# EAGLE board Combined-4-ordered-080117 (EAGLE 6.5.0)
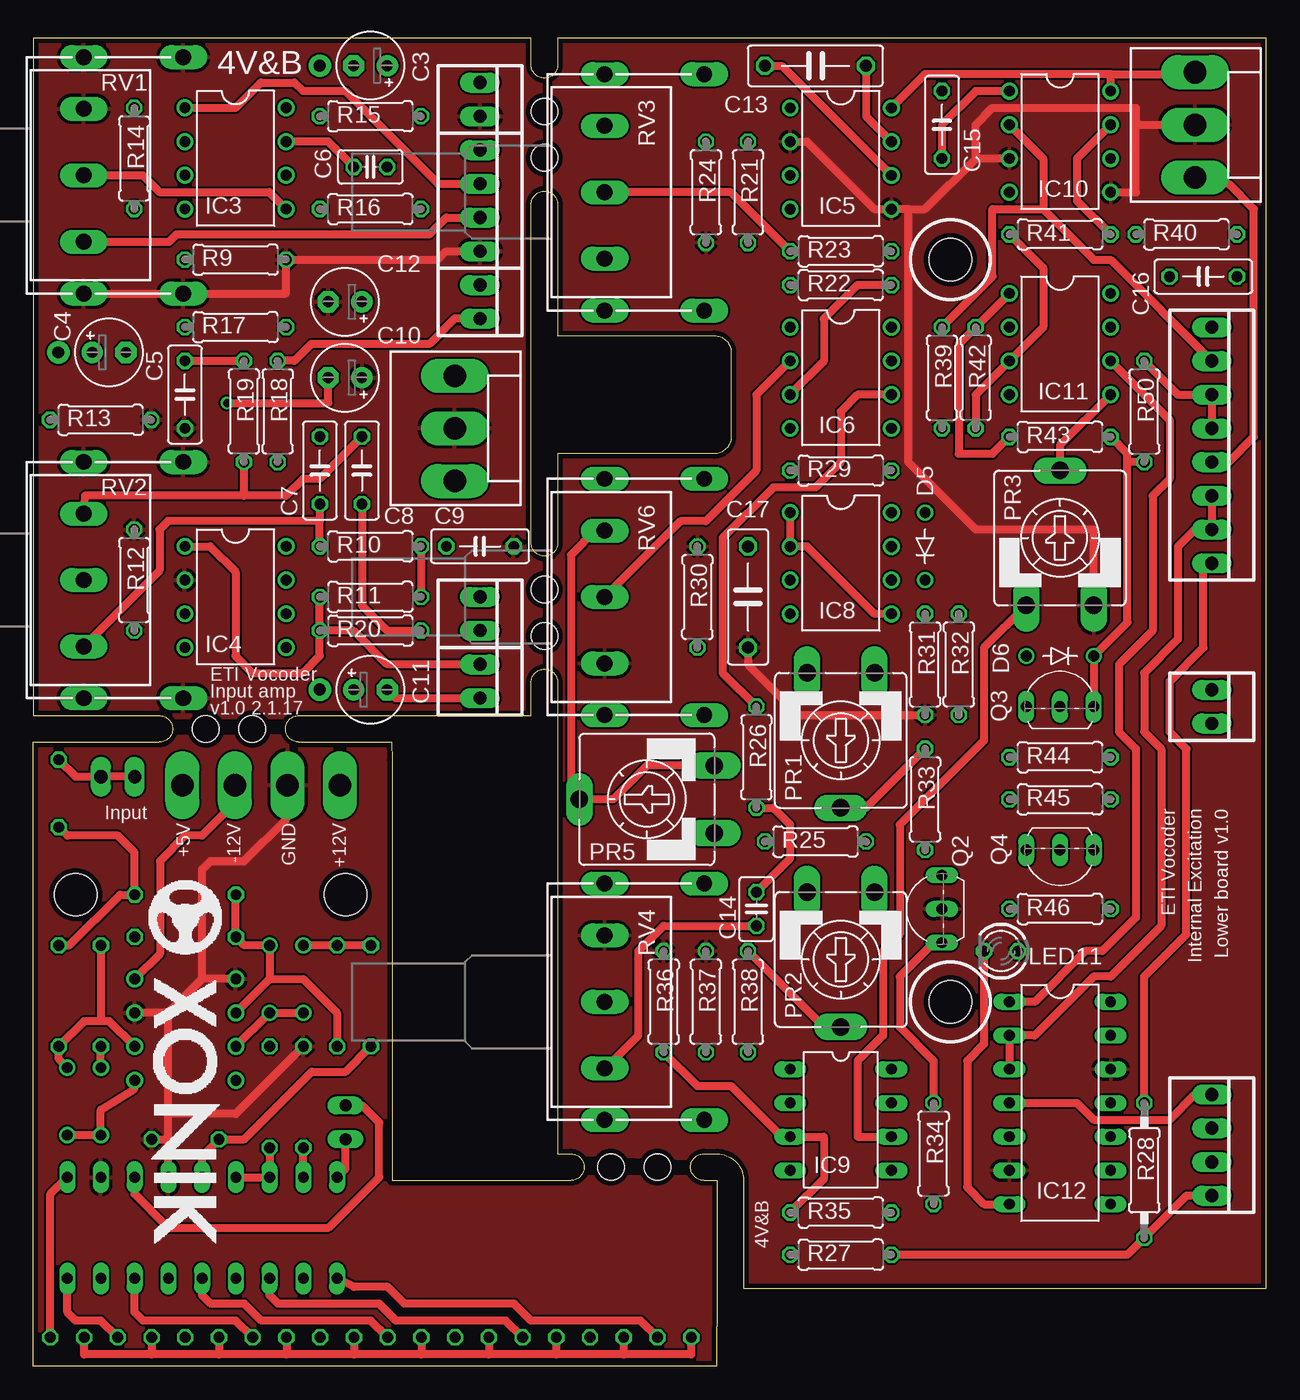
[diagram p0: board, top side]
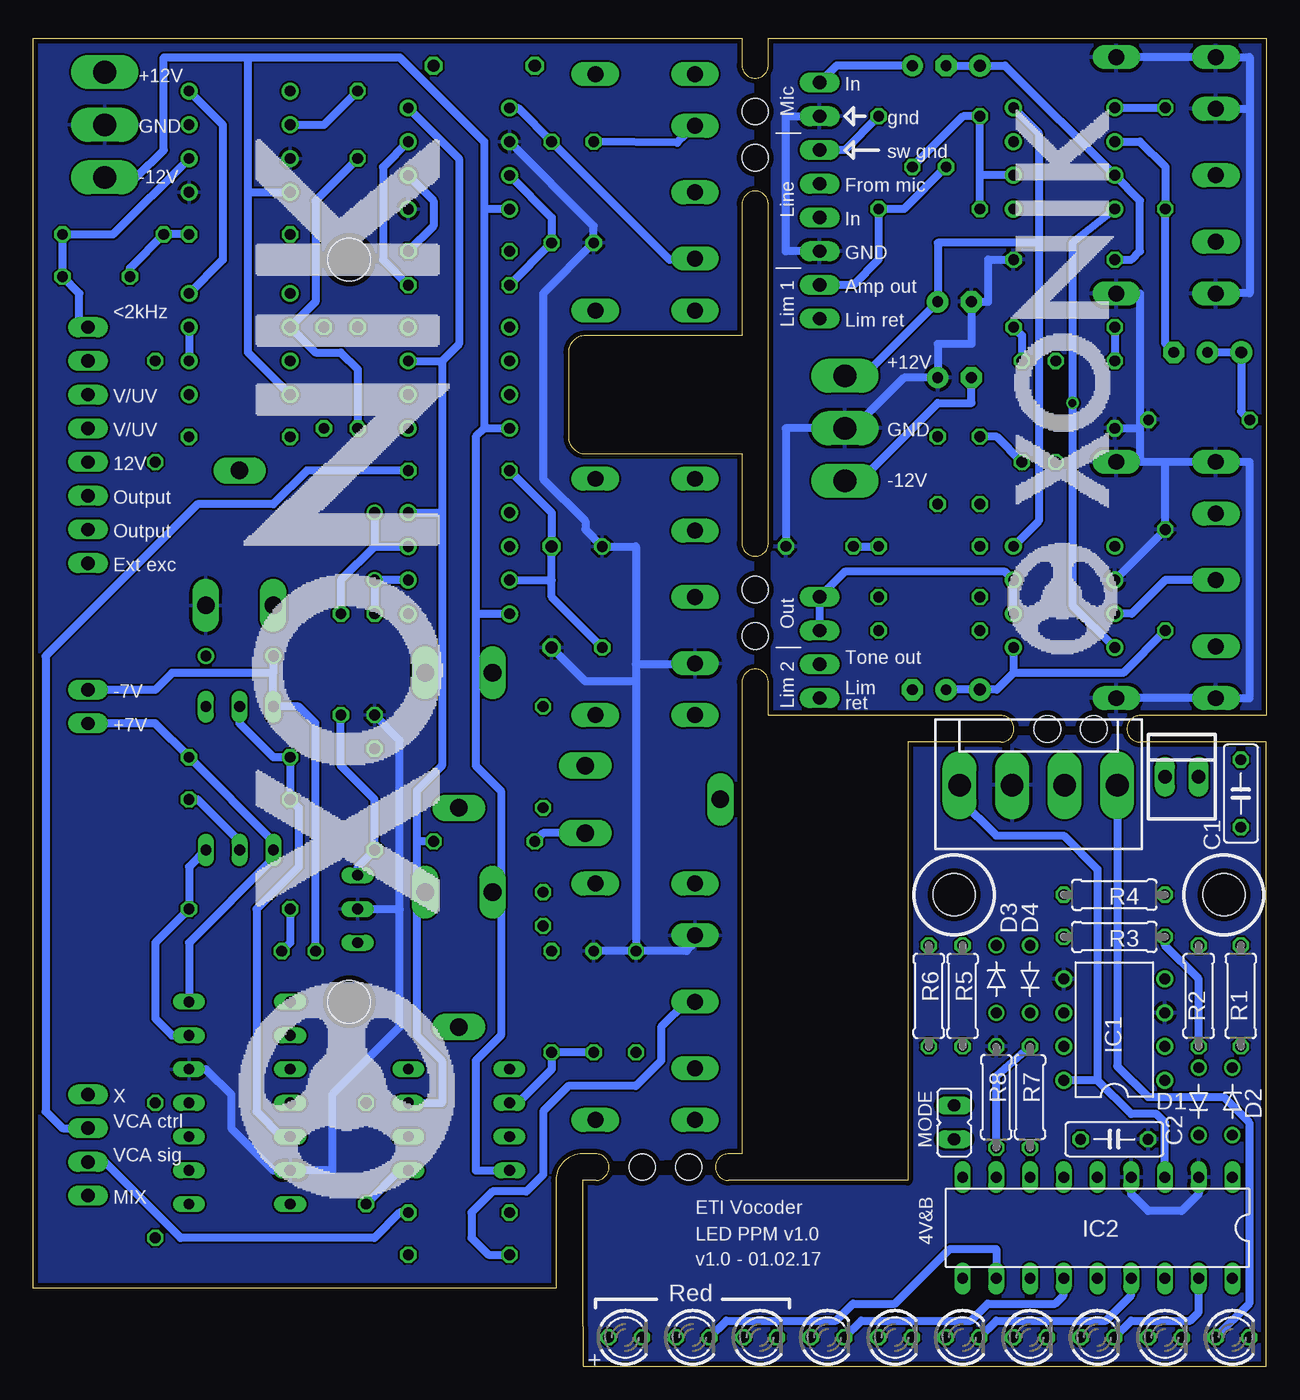
[diagram p1: board, bottom side, seen from below]

Size 92.87 x 100 mm. Coordinates in mm from the lower left corner, seen from the top.
Outline: 0,0 0,47 9.5,47 arc180 9.5,49 0,49 0,100 37.5,100 37.5,98 arc180 39.5,98 39.5,100 92.87,100 92.87,5.88 53.5,5.88 53.5,14 arc90 51.5,16 50.5,16 arc180 50.5,14 51.5,14 51.5,5.97 51.45,0 0,0
Outline: 20,47 27,47 27.01,45.67 27.01,14 40.5,14 arc180 40.5,16 39.5,16 39.5,51.5 arc180 37.5,51.5 37.5,49 20,49 arc180 20,47
Outline: 37.5,62 37.5,87.5 arc-180 39.5,87.5 39.5,77.62 51.29,77.62 arc-90 52.56,76.35 52.56,70 arc-90 51.29,68.73 39.5,68.73 39.5,62 arc-180 37.5,62
Copper layers (1*16): Top 0.0356mm / dielectric 1.5011mm / Bottom 0.0356mm
Design rules "oshpark-2layer": minimum track width 6mil, minimum drill 13mil, track to track 6mil, track to pad 6mil, pad to pad 6mil, via to via 6mil, smd to smd 6mil, copper to edge 15mil, drill to drill 6mil, minimum pad ring 7mil, minimum via ring 7mil, stop-mask expansion 2.5mil, vias tented up to drill 0mil, thermal gap 10mil
Holes 3.2 mm at 3.2,35.51 23.52,35.51 69.07,83.33 69.07,27.45
Holes 2 mm at 16.5,48 13,48 43.5,15 47,15 38.5,55 38.5,58.5 38.5,94.5 38.5,91

## Footprints (pad centres in the part's own frame; a part is rotated, then mirrored left to right if it is on the bottom)
22-23-2041 = drill 1 long: 1 -3.81,0; 2 -1.27,0; 3 1.27,0; 4 3.81,0
22-23-2021 = drill 1 long: 1 -1.27,0; 2 1.27,0
C050-025X075 = drill 0.813 octagon: 1 -2.54,0; 2 2.54,0
E2,5-5 = drill 0.813 pad 1.6: + -1.27,0 | drill 0.813 pad 1.6 octagon: - 1.27,0
C025-025X050 = drill 0.813 octagon: 1 -1.27,0; 2 1.27,0
C075-032X103 = drill 0.914 octagon: 1 -3.81,0; 2 3.81,0
DO35-5J = drill 0.813: A 2.54,0; C -2.54,0
DIL08 = drill 0.813 pad 1.27: 1 -3.81,-3.81; 2 -1.27,-3.81; 3 1.27,-3.81; 4 3.81,-3.81; 5 3.81,3.81; 6 1.27,3.81; 7 -1.27,3.81; 8 -3.81,3.81
DIL18 = drill 0.813 long: 1 -10.16,-3.81; 2 -7.62,-3.81; 3 -5.08,-3.81; 4 -2.54,-3.81; 5 0,-3.81; 6 2.54,-3.81; 7 5.08,-3.81; 8 7.62,-3.81; 9 10.16,-3.81; 10 10.16,3.81; 11 7.62,3.81; 12 5.08,3.81; 13 2.54,3.81; 14 0,3.81; 15 -2.54,3.81; 16 -5.08,3.81; 17 -7.62,3.81; 18 -10.16,3.81
DIL08' = drill 0.813 long: 1 -3.81,-3.81; 2 -1.27,-3.81; 3 1.27,-3.81; 4 3.81,-3.81; 5 3.81,3.81; 6 1.27,3.81; 7 -1.27,3.81; 8 -3.81,3.81
DIL14 = drill 0.813 long: 1 -7.62,-3.81; 2 -5.08,-3.81; 3 -2.54,-3.81; 4 0,-3.81; 5 2.54,-3.81; 6 5.08,-3.81; 7 7.62,-3.81; 8 7.62,3.81; 9 5.08,3.81; 10 2.54,3.81; 11 0,3.81; 12 -2.54,3.81; 13 -5.08,3.81; 14 -7.62,3.81
22-23-2081 = drill 1 long: 1 -8.89,0; 2 -6.35,0; 3 -3.81,0; 4 -1.27,0; 5 1.27,0; 6 3.81,0; 7 6.35,0; 8 8.89,0
LED3MM = drill 0.813 octagon: A -1.27,0; K 1.27,0
JP1 = drill 0.914 long: 1 0,-1.27; 2 0,1.27
KK-156-4 = drill 1.7 pad 2.184 long: 1 -5.94,0; 2 -1.98,0; 3 1.98,0; 4 5.94,0
KK-156-3 = drill 1.7 pad 2.184 long: 1 -3.96,0; 2 0,0; 3 3.96,0
CA9V = drill 1.321 long: A -2.54,-5.08; E 2.54,-5.08; S 0,5.08
TO92-CBE = drill 0.813 long: B 0,0; C -2.54,0; E 2.54,0
TO92-ECB = drill 0.813 long: B 2.54,0; C 0,0; E -2.54,0
0207/7 = drill 0.813 octagon: 1 -3.81,0; 2 3.81,0
0207/10 = drill 0.813 octagon: 1 -5.08,0; 2 5.08,0
POT16_W_BRACKET = drill 1.2 long: 1A -5,0; 1E 5,0; 1S 0,0; M1 -8.9,0; M2 8.9,0; M3 8.9,7.5; M4 -8.9,7.5

## Placement (x,y rotation side)
BOARD2  22-23-2041  [22-23-2041]  88.75,16.66 270 top
BOARD2-PWR  22-23-2021  [22-23-2021]  88.75,49.68 270 top
C1  220n  [C050-025X075]  1.93,43.13 270 bottom
C2  470n  [C050-025X075]  11.45,17.1 180 bottom
C3  1u  [E2,5-5]  25.39,97.94 180 top
C4  22u  [E2,5-5]  5.71,76.36 0 top
C5  220n  [C050-025X075]  11.42,73.18 270 top
C6  68p  [C025-025X050]  25.39,90.33 180 top
C7  2n2  [C050-025X075]  21.58,67.47 270 top
C8  2n2  [C050-025X075]  24.76,67.47 270 top
C9  220n  [C050-025X075]  33.65,61.75 180 top
C10  22u/25V  [E2,5-5]  23.49,74.45 180 top
C11  1u  [E2,5-5]  25.39,50.95 0 top
C12  22u/25V  [E2,5-5]  23.49,80.17 180 top
C13  100n  [C075-032X103]  58.91,97.94 0 top
C14  10n  [C025-025X050]  54.47,34.44 90 top
C15  220n  [C050-025X075]  68.44,93.49 270 top
C16  1u0  [C050-025X075]  88.12,82.06 180 top
C17  100n  [C075-032X103]  53.83,57.93 90 top
D1  1N4148DOJ35-5  [DO35-5J]  5.1,19.95 90 bottom
D2  1N4148DOJ35-5  [DO35-5J]  2.56,19.95 270 bottom
D3  1N4148DOJ35-5  [DO35-5J]  20.34,29.16 270 bottom
D4  1N4148DOJ35-5  [DO35-5J]  17.8,29.16 90 bottom
D5  1N4148  [DO35-5J]  67.17,61.74 90 top
D6  1N4148  [DO35-5J]  77.33,53.49 180 top
IC1  TL082P  [DIL08]  11.45,25.35 90 bottom
IC2  LM3915N  [DIL18]  12.72,10.43 180 bottom
IC3  LM4558N  [DIL08]  15.23,90.96 270 top
IC4  LM1458N  [DIL08]  15.23,57.94 270 top
IC5  LM1458N  [DIL08]  60.81,90.95 270 top
IC6  TL081P  [DIL08]  60.81,74.44 270 top
IC8  TL082P  [DIL08]  60.81,60.47 270 top
IC9  CA3080E  [DIL08']  60.81,18.56 270 top
IC10  LM1458N  [DIL08]  77.33,92.22 270 top
IC11  LM1458N  [DIL08]  77.33,76.98 270 top
IC12  4016N  [DIL14]  77.33,19.83 270 top
IN  22-23-2021  [22-23-2021]  6.37,44.4 0 bottom
IO  22-23-2081  [22-23-2081]  88.75,69.36 270 top
LED1  [LED3MM]  2.56,2.17 0 bottom
LED2  [LED3MM]  7.64,2.17 0 bottom
LED3  [LED3MM]  12.72,2.17 0 bottom
LED4  [LED3MM]  17.8,2.17 0 bottom
LED5  [LED3MM]  22.88,2.17 0 bottom
LED6  [LED3MM]  27.96,2.17 0 bottom
LED7  [LED3MM]  33.04,2.17 0 bottom
LED8  [LED3MM]  38.12,2.17 0 bottom
LED9  [LED3MM]  43.2,2.17 0 bottom
LED10  [LED3MM]  48.28,2.17 0 bottom
LED11  [LED3MM]  72.88,31.26 180 top
LIM1  22-23-2021  [22-23-2021]  33.65,80.17 270 top
LIM2  22-23-2021  [22-23-2021]  33.65,51.59 270 top
LINE  22-23-2041  [22-23-2041]  33.65,87.78 270 top
MIC  22-23-2021  [22-23-2021]  33.65,95.41 270 top
MODE  [JP1]  23.52,18.37 0 bottom
OUT  22-23-2021  [22-23-2021]  33.65,56.67 270 top
POWER  [KK-156-4]  17.17,43.77 0 bottom
POWER1  [KK-156-3]  31.74,70.64 270 top
POWER2  [KK-156-3]  87.48,93.49 270 top
PR1  100k  [CA9V]  60.81,47.14 180 top
PR2  100k  [CA9V]  60.81,30.63 180 top
PR3  220k  [CA9V]  77.33,62.38 0 top
PR5  2k2  [CA9V]  46.21,42.69 90 top
Q2  BC212L  [TO92-CBE]  68.44,34.44 90 top
Q3  BC182L  [TO92-ECB]  77.33,49.68 0 top
Q4  BC212L  [TO92-CBE]  77.33,38.88 180 top
R1  100k  [0207/7]  1.93,27.89 90 bottom
R2  100k  [0207/7]  5.1,27.89 90 bottom
R3  100k  [0207/7]  11.45,32.34 0 bottom
R4  200k  [0207/7]  11.45,35.51 0 bottom
R5  200k  [0207/7]  22.88,27.89 270 bottom
R6  1k  [0207/7]  25.42,27.89 270 bottom
R7  680R  [0207/7]  17.8,20.27 270 bottom
R8  150R  [0207/7]  20.34,20.27 270 bottom
R9  100k  [0207/7]  15.23,83.34 180 top
R10  47k  [0207/7]  25.39,61.75 0 top
R11  1k5  [0207/7]  25.39,57.94 180 top
R12  100k  [0207/7]  7.61,59.21 270 top
R13  470R/5k6  [0207/7]  5.07,71.28 180 top
R14  22k  [0207/7]  7.61,90.96 270 top
R15  11k  [0207/7]  25.39,94.14 180 top
R16  100k  [0207/7]  25.39,87.15 0 top
R17  1k5  [0207/7]  15.23,78.26 180 top
R18  51k  [0207/7]  18.41,71.91 270 top
R19  47k  [0207/7]  15.87,71.91 90 top
R20  51k  [0207/7]  25.39,55.4 180 top
R21  10k  [0207/7]  53.83,88.41 90 top
R22  5k6  [0207/7]  60.81,81.43 0 top
R23  18k  [0207/7]  60.81,83.97 180 top
R24  560R  [0207/7]  50.66,88.41 270 top
R25  11k  [0207/7]  58.91,39.52 180 top
R26  150k  [0207/7]  54.47,45.87 90 top
R27  47k  [0207/7]  60.81,8.4 180 top
R28  47k  [0207/10]  83.67,14.75 90 top
R29  10k  [0207/7]  60.81,67.46 180 top
R30  1M  [0207/7]  50.02,57.93 90 top
R31  3k9  [0207/7]  67.17,52.85 270 top
R32  22k  [0207/7]  69.7,52.85 90 top
R33  470k  [0207/7]  67.17,42.69 270 top
R34  10k  [0207/7]  67.8,16.02 270 top
R35  47k  [0207/7]  60.81,11.58 0 top
R36  1k5  [0207/7]  47.48,27.45 90 top
R37  1k5  [0207/7]  50.66,27.45 90 top
R38  470k  [0207/7]  53.83,27.45 90 top
R39  47k  [0207/7]  68.44,74.44 270 top
R40  10k  [0207/7]  86.85,85.24 180 top
R41  1k  [0207/7]  77.33,85.24 180 top
R42  1M  [0207/7]  70.97,74.44 90 top
R43  47k  [0207/7]  77.33,70 0 top
R44  10k  [0207/7]  77.33,45.87 0 top
R45  10k  [0207/7]  77.33,42.69 180 top
R46  1k5  [0207/7]  77.33,34.44 180 top
R50  10k  [0207/7]  83.67,71.9 270 top
RV1  10k log  [POT16_W_BRACKET]  3.8,89.69 270 top
RV2  47k lin  [POT16_W_BRACKET]  3.8,59.21 270 top
RV3  10k log  [POT16_W_BRACKET]  43.03,88.41 270 top
RV4  10k log  [POT16_W_BRACKET]  43.03,27.45 270 top
RV6  10k  [POT16_W_BRACKET]  43.03,57.93 270 top

## Library data of the parts
BOARD2 LINE = con-molex; MF: MOLEX; MPN: 22-23-2041; OC_FARNELL: 1462920; OC_NEWARK: 38C0355
BOARD2-PWR IN LIM1 LIM2 MIC OUT = con-molex; MF: MOLEX; MPN: 22-23-2021; OC_FARNELL: 1462926; OC_NEWARK: 25C3832
C1-C17 R1-R46 R50 = resistor
D1-D6 IC9 RV1-RV4 RV6 = joakim
IC1 = linear; DATA_SHEET: <a href="http://www.ti.com/lit/ds/symlink/tl084a.pdf"> Data sheet </a>
IC2 = national-semiconductor
IC3-IC6 IC8 IC10 IC11 = linear
IC12 = 40xx
IO = con-molex; MF: MOLEX; MPN: 22-23-2081; OC_FARNELL: 1756826; OC_NEWARK: 01C7592
LED1-LED11 = led
MODE = jumper
POWER POWER1 POWER2 = con-molex; OC_FARNELL: unknown; OC_NEWARK: unknown
PR1-PR3 PR5 = pot
Q2-Q4 = transistor

## Nets
2KHZ: C16.1 IC10.6 IO.1 R40.1
4KHZ: C15.1 IC10.2 IO.2 R39.1
+5V: LED1.A LED2.A LED3.A LED4.A LED5.A LED6.A LED7.A LED8.A LED9.A LED10.A POWER.4
+12V: IC1.8 IC2.3 MODE.2 POWER.1
+12V1: C12.+ IC3.8 IC4.8 POWER1.1
+12V2: IC5.8 IC6.7 IC8.8 IC9.7 IC10.8 IC11.8 POWER2.1 PR1.A PR2.A R25.1
-12V: IC1.4 POWER.3
-12V1: C10.- IC3.4 IC4.4 POWER1.3
-12V2: IC5.4 IC6.4 IC8.4 IC9.4 IC10.4 IC11.4 IO.5 POWER2.3 PR1.E PR2.E
AMP_OUT: C6.2 IC3.7 LIM1.1 R16.2
BOARD2_MIX: BOARD2.4 R27.1 R28.1
BUFFER_IN: C11.- LIM2.2
EXT_EXCIT: IO.8 R28.2
GND: C2.1 IC1.3 IC1.5 IC2.2 IC2.4 POWER.2 R8.1
GND1: C5.2 C9.1 C10.+ C12.- IC4.2 LINE.4 MIC.2 POWER1.2 R9.1 R12.1 R13.1 RV1.1A RV1.M1 RV1.M2 RV1.M3 RV1.M4 RV2.M1 RV2.M2 RV2.M3 RV2.M4
GND2: C17.1 IC5.2 IC5.5 IC10.3 IC10.5 IC12.6 IC12.12 POWER2.2 PR3.E Q2.B R24.2 R30.2 R31.2 R36.2 R37.2 RV4.1A RV6.1E
LINE_IN: LINE.3 RV1.1E
MIC_IN: C3.+ MIC.1
MIC_OUT: IC3.1 LINE.2 R14.1
MODE: IC2.9 MODE.1
N$1: D1.A R2.1 R3.2
N$2: D2.C IC1.2 R1.1 R2.2
N$3: D1.C D2.A IC1.1
N$4: D4.A IC1.6 R3.1 R4.1 R5.2
N$5: D3.C R5.1 R6.1
N$6: C1.2 R1.2 R4.2
N$7: D3.A D4.C IC1.7
N$8: C2.2 IC2.5 R6.2
N$9: IC2.6 IC2.7 R7.2
N$10: C3.- IC3.3 R9.2
N$11: IC2.1 LED1.K
N$12: IC2.18 LED2.K
N$13: IC2.17 LED3.K
N$14: IC2.16 LED4.K
N$15: IC2.15 LED5.K
N$16: IC2.14 LED6.K
N$17: IC2.13 LED7.K
N$18: IC2.12 LED8.K
N$19: IC2.11 LED9.K
N$20: IC2.10 LED10.K
N$21: IC2.8 R7.1 R8.2
N$22: C1.1 IN.1 IN.2
N$23: C4.- IC3.2 R14.2
N$24: C4.+ R13.2
N$25: C6.1 IC3.6 R15.2 R16.1
N$26: C5.1 R17.2 R19.2
N$27: C8.1 R19.1 RV2.1A
N$28: C7.2 R10.1 RV2.1E
N$29: C7.1 R18.2
N$30: C8.2 R20.1
N$31: C9.2 R10.2 R11.1
N$32: C11.+ IC4.5 R12.2
N$33: IC4.3 RV2.1S
N$34: IC3.5 RV1.1S
N$35: IC5.3 R21.1 R22.1
N$36: IC5.1 R21.2 RV3.1E
N$37: R23.2 RV3.1S
N$38: C13.1 IC5.6 R23.1
N$39: R24.1 RV3.1A
N$40: C13.2 IC5.7 IC6.3 R22.2
N$41: IC6.2 RV6.1S
N$42: PR5.A R25.2
N$43: PR5.E PR5.S RV6.1A
N$44: IC6.6 R26.2
N$45: C14.2 R26.1
N$46: C14.1 RV4.1E
N$47: R27.2 RV4.1S
N$48: C15.2 IC10.1 IC11.2 R39.2
N$49: C16.2 IC10.7 R40.2 R41.1
N$50: IC11.3 R41.2 R42.1
N$51: IC11.1 R42.2 R43.1
N$52: IC12.5 Q3.C R44.1 R45.2
N$53: Q4.B R45.1
N$54: D6.C Q3.B R43.2 R50.2
N$55: IC12.13 Q4.C R46.1
N$56: LED11.A R46.2
N$57: IC9.3 R35.1 R36.1
N$58: IC9.2 R37.1 R38.1
N$59: PR2.S R38.2
N$60: IC9.5 R34.2
N$61: Q2.E R32.1 R33.2
N$62: PR1.S R33.1
N$63: IC11.5 PR3.S
N$64: IC11.6 IC11.7 IC12.1
N$65: D5.A IC8.7 R32.2
N$66: IC8.1 IC8.2 IC8.5
N$67: D5.C IC8.6 R31.1
N$68: C17.2 IC8.3 R29.2 R30.1
N$69: IC9.6 PR3.A
N$70: Q2.C R34.1
OUT: IC4.6 IC4.7 OUT.1 OUT.2
OUT1: IC12.2 IC12.3 IO.6 IO.7
SWITCHED_GND: LINE.1 R15.1
TONE_IN: LIM1.2 R17.1 R18.1
TONE_OUT: IC4.1 LIM2.1 R11.2 R20.2
V_UV_ON_OFF: IO.3 IO.4 R50.1
VCA_CTRL: BOARD2.2 R29.1
VCA_SIGNAL: BOARD2.3 R35.2
VDD: BOARD2-PWR.2 IC12.14 Q4.E R44.2
VSS: BOARD2-PWR.1 D6.A IC12.7 LED11.K Q3.E
X: BOARD2.1 IC12.4

## Tracks (layer width: path | path; a pad name or v marks a point on that pad's centre or on a via)
2KHZ
  Bottom 0.61: IO.1 89.39,78.89 89.39,80.79 C16.1 R40.1 86.85,85.24 IC10.6
4KHZ
  Top 0.61: IC10.2 76.06,90.95 76.06,87.14 | 76.06,87.14 79.86,83.33 81.14,83.33 IO.2 | R39.1 72.25,82.06 72.25,87.14 76.06,87.14
  Bottom 0.61: IC10.2 70.97,93.49 C15.1
+5V
  Top 0.61: LED10.A 49.55,0.91 44.47,0.91 | 44.47,0.91 39.39,0.91 | 39.39,0.91 34.31,0.91 | 34.31,0.91 29.23,0.91 | 29.23,0.91 24.15,0.91 | 24.15,0.91 19.07,0.91 | 19.07,0.91 13.99,0.91 | 13.99,0.91 8.91,0.91 | 8.91,0.91 3.83,0.91 LED1.A | LED2.A 8.91,0.91 | LED3.A 13.99,0.91 | LED4.A 19.07,0.91 | LED5.A 24.15,0.91 | LED6.A 29.23,0.91 | LED7.A 34.31,0.91 | LED8.A 39.39,0.91 | LED9.A 44.47,0.91
  Bottom 0.61: POWER.4 11.23,22.59 8.91,20.27 3.2,20.27 1.29,18.37 1.29,4.71 LED1.A
+12V
  Top 0.61: IC2.3 7.64,12.97 10.18,10.43 22.25,10.43 26.06,14.24 26.06,18.37 24.79,19.64 MODE.2
  Bottom 0.61: IC2.3 7.64,18.37 8.28,19 10.18,19 12.72,21.54 | 12.72,21.54 IC1.8 | POWER.1 23.11,42.72 20.34,39.96 15.26,39.96 12.72,37.42 12.72,21.54
+12V1
  Bottom 0.61: IC3.8 17.14,92.86 17.14,84.61 | 17.14,84.61 17.14,63.66 IC4.8 | POWER1.1 31.59,74.45 30.47,74.45 C12.+ 24.76,84.61 17.14,84.61
+12V2
  Top 0.61: 81.14,97.3 67.17,97.3 IC5.8 | IC10.8 81.14,97.3 | 81.14,97.3 88.61,97.3 POWER2.1
  Bottom 0.61: IC5.8 60.81,90.95 60.81,76.98 62.09,75.71 | 62.09,75.71 62.09,64.28 | IC6.7 62.09,75.71 | IC8.8 62.09,64.28 | 62.09,64.28 62.09,52.22 | PR1.A 62.09,52.22 | 62.09,52.22 62.09,45.23 63.99,43.33 63.99,39.52 | 63.99,39.52 63.99,36.34 PR2.A 63.99,35.07 63.99,24.91 62.09,23.01 62.09,19.83 IC9.7 | IC11.8 78.59,83.33 78.59,93.49 IC10.8 | R25.1 63.99,39.52
-12V
  Top 0.61: POWER.3 15.19,42.42 12.72,39.96 11.45,39.96 9.55,38.05 9.55,31.07 IC1.4
-12V1  (via drill 0.6)
  Top 0.61: v14.6,72.55 22.22,72.55 C10.-
  Bottom 0.61: POWER1.3 30.62,66.68 24.76,72.55 22.22,72.55 C10.- | IC3.4 14.6,84.61 v14.6,72.55 14.6,57.3 IC4.4
-12V2
  Top 0.61: IO.5 90.03,68.09 91.93,70 91.93,87.14 90.03,89.05 87.97,89.05 POWER2.3
  Bottom 0.61: IC5.4 58.91,87.14 | 58.91,87.14 58.91,70.63 | 58.91,70.63 59.55,70 59.55,56.66 | IC6.4 58.91,70.63 | 59.55,56.66 59.55,52.22 | 59.55,52.22 59.55,45.23 57.64,43.33 57.64,36.34 PR2.E 57.64,35.07 57.64,24.91 59.55,23.01 59.55,14.75 IC9.4 | PR1.E 59.55,52.22 | IC8.4 59.55,56.66 | 76.69,88.41 76.69,76.35 IC11.4 | 76.69,88.41 IC10.4 | 76.69,88.41 76.69,98.57 | 76.69,98.57 65.26,98.57 58.91,92.22 58.91,87.14 | POWER2.3 85.09,89.53 83.04,91.59 83.04,98.57 76.69,98.57
AMP_OUT
  Top 0.61: C6.2 22.22,92.23 IC3.7
  Bottom 0.61: LIM1.1 31.11,81.44 29.2,83.34 R16.2 27.3,87.15 C6.2
BOARD2_MIX
  Top 0.61: R27.1 82.41,8.4 R28.1 86.85,12.85 BOARD2.4
BUFFER_IN
  Top 0.61: C11.- 27.3,50.32 LIM2.2
EXT_EXCIT
  Top 0.61: R28.2 83.67,29.36 86.85,32.53 86.85,46.5 85.58,47.77 85.58,51.58 88.12,54.12 88.12,59.84 IO.8
GND
  Top 0.61: IC2.4 10.18,17.1 | C2.1 10.18,17.1 | 10.18,17.1 10.18,19 | 10.18,19 10.18,26.62 | 10.18,26.62 IC1.3 | 12.72,29.16 10.18,26.62 | IC1.5 12.72,29.16 | 12.72,29.16 12.72,37.42 13.36,38.05 15.9,38.05 19.07,41.23 19.07,43.69 POWER.2 | R8.1 15.26,19 10.18,19
  Bottom 0.61: IC2.2 5.1,12.97 6.37,11.7 8.91,11.7 10.18,12.97 IC2.4
  pour Bottom: 51.5,-1.21 51.5,14.25 28.75,14.25 28.67,14.22 27.5,14.22 27.5,47.25 -0.65,47.72 -0.65,-1.13
  pour Top: 51.18,-1.89 -1.5,-1.8 -1.5,47.38 27.5,47.5 27.5,14.38 27.52,14.13 28.25,14.25 51.5,14.25 51.75,-1.89
GND1
  Top 0.61: LINE.4 31.11,83.97 30.47,83.34 R9.1 19.04,80.8 19.03,80.79 RV1.M3 RV1.M2
  Bottom 0.61: RV1.M3 9.53,80.79 9.52,80.8 9.52,71.28 | 9.52,71.28 9.52,70.64 | 9.52,70.64 9.52,68.1 | 9.52,68.1 RV2.M4 | 7.61,68.11 RV2.M1 1.26,68.1 1.26,50.32 1.27,50.31 RV2.M2 RV2.M3 | 7.61,68.11 9.51,68.11 9.52,68.1 | 1.26,94.77 1.26,98.58 1.27,98.59 RV1.M1 RV1.M4 | 1.26,94.77 1.26,80.8 RV1.M2 | 7.61,68.11 R12.1 IC4.2 | RV1.1A 1.34,94.69 1.26,94.77 | C5.2 9.52,70.64 | R9.1 20.95,83.34 20.95,80.17 C12.- 22.22,76.99 24.76,76.99 C10.+ 27.3,74.45 31.11,70.64 POWER1.2 36.19,70.64 C9.1 | R13.1 9.52,71.28 | LINE.4 36.19,83.97 36.19,94.14 MIC.2
  pour Top: 0.12,100.68 38.09,100.68 38.22,100.8 38.22,48.86 0.37,48.86 0.25,48.73 0.25,100.55
  pour Bottom: -0.64,100.04 37.08,100.04 37.2,99.91 37.2,48.35 -0.39,48.35 -0.39,99.79
GND2
  Top 0.61: IC5.2 58.27,92.22 63.35,87.14 IC5.5 65.89,87.14 | C17.1 53.83,52.85 57.64,49.04 R31.2 | IC10.5 83.04,88.41 83.04,93.49 | 70.97,90.95 67.17,87.14 65.89,87.14 | IC10.3 70.97,90.95 | 70.97,90.95 70.97,93.49 72.25,94.76 83.04,94.76 83.04,93.49 | 83.04,93.49 POWER2.2 | PR3.E 79.86,63.01 70.97,63.01 65.89,68.09 65.89,87.14
  Bottom 0.61: IC5.2 50.66,85.87 R24.2 54.47,80.79 54.47,66.82 51.29,63.65 51.29,63.01 R30.2 47.48,61.74 47.48,52.85 | RV6.1E 43.12,52.85 47.48,52.85 | 47.48,52.85 47.48,51.58 | 47.48,51.58 51.29,51.58 C17.1 | 47.48,51.58 R36.2 | 43.03,32.53 RV4.1A 43.03,31.9 43.67,31.26 R36.2 | R36.2 R37.2 | IC12.12 79.86,22.37 77.96,20.47 77.96,17.93 74.78,14.75 IC12.6 70.34,14.75 70.34,20.47 65.26,25.55 65.26,34.44 | 65.26,34.44 65.26,47.14 R31.2 | Q2.B 65.26,34.44
  pour Bottom: 93.83,100.6 38.72,100.6 38.72,15.73 52,15.5 53,15 53,5.5 93.83,5.23
  pour Top: 93.2,99.84 39.23,99.84 39.23,15.98 52.5,15.5 53,15 53.5,5.5 93.2,5.48
LINE_IN
  Top 0.61: RV1.1E 10.23,84.69 10.79,85.25 29.84,85.25 31.11,86.52 LINE.3
MIC_IN
  Bottom 0.61: C3.+ 32.38,97.94 MIC.1
MIC_OUT
  Top 0.61: IC3.1 15.23,94.77 17.14,96.67 19.68,96.67 20.31,96.04 23.49,96.04 30.47,89.06 LINE.2
  Bottom 0.61: IC3.1 R14.1
MODE
  Top 0.61: IC2.9 23.52,14.88 MODE.1
N$1
  Top 0.61: D1.A R2.1
  Bottom 0.61: R2.1 5.1,29.16 7.64,31.7 R3.2
N$2
  Top 0.61: IC1.2 5.74,25.99 5.1,25.99 | 5.1,25.99 3.83,25.99 R1.1 1.93,23.13 D2.C | R2.2 5.1,25.99
N$3
  Top 0.61: D2.A D1.C 5.1,19.32 7.64,20.91 IC1.1
N$4
  Top 0.61: IC1.6 17.8,29.16 | 17.8,29.16 20.34,29.16 22.88,26.62 R5.2 | 17.8,29.16 D4.A 15.9,31.7 R3.1 R4.1
N$5
  Top 0.61: R6.1 R5.1 D3.C
N$6
  Top 0.61: R1.2 2.73,31.7 6.54,35.51 R4.2 7.64,38.69 6.37,39.96 2.56,39.96 C1.2
N$7
  Top 0.61: IC1.7 D4.C D3.A
N$8
  Top 0.61: IC2.5 12.72,15.83 C2.2 15.9,17.1 20.98,22.18 23.52,22.18 R6.2
N$9
  Top 0.61: IC2.6 IC2.7 R7.2
N$10  (via drill 0.9 pad 1.68)
  Bottom 0.61: C3.- v21.58,97.94 19.68,97.94 IC3.3 9.52,87.78 9.52,83.97 10.15,83.34 R9.2
N$11
  Top 0.61: LED1.K 1.29,12.97 IC2.1
N$12
  Top 0.61: LED2.K 5.1,3.44 3.2,3.44 2.56,4.08 IC2.18
N$13
  Bottom 0.61: LED3.K 10.18,3.44 5.74,3.44 5.1,4.08 IC2.17
N$14
  Top 0.61: LED4.K 15.26,3.44 8.28,3.44 7.64,4.08 IC2.16
N$15
  Bottom 0.61: LED5.K 20.34,3.44 12.09,3.44 10.18,5.35 IC2.15
N$16
  Top 0.61: LED6.K 25.42,3.44 17.17,3.44 15.9,4.71 13.36,4.71 12.72,5.35 IC2.14
N$17
  Bottom 0.61: LED7.K 30.5,3.44 22.25,3.44 20.98,4.71 15.9,4.71 15.26,5.35 IC2.13
N$18
  Top 0.61: LED8.K 35.58,3.44 27.33,3.44 26.06,4.71 18.44,4.71 17.8,5.35 IC2.12
N$19
  Bottom 0.61: LED9.K 40.66,3.44 32.41,3.44 31.14,4.71 27.96,4.71 23.84,8.84 20.34,8.84 IC2.11
N$20
  Top 0.61: LED10.K 45.74,3.44 37.49,3.44 36.22,4.71 27.96,4.71 26.69,5.99 24.15,5.99 IC2.10
N$21
  Top 0.61: IC2.8 R8.2
  Bottom 0.61: R8.2 20.34,21.86 R7.1
N$22
  Top 0.61: C1.1 3.2,44.4 IN.2 IN.1
N$23
  Bottom 0.61: C4.- 7.61,76.99 R14.2 7.61,90.33 9.52,92.23 IC3.2
N$24  (via drill 0.9 pad 1.68)
  Bottom 0.61: C4.+ v1.9,76.36 1.9,71.91 R13.2
N$25
  Bottom 0.61: R16.1 21.58,89.69 | 21.58,89.69 R15.2 22.85,94.14 C6.1 | IC3.6 21.58,89.69
N$26
  Top 0.61: C5.1 R19.2
  Bottom 0.61: R17.2 C5.1
N$27
  Top 0.61: C8.1 21.58,66.83 20.31,66.83 19.04,65.56 15.87,65.56 | 15.87,65.56 3.88,65.56 RV2.1A | R19.1 15.87,65.56
N$28
  Top 0.61: R10.1 21.58,63.66 | C7.2 21.58,63.66 | 21.58,63.66 10.15,63.66 9.52,63.02 9.52,59.92 RV2.1E
N$29
  Bottom 0.61: R18.2 20.31,70 C7.1
N$30
  Top 0.61: C8.2 24.76,57.3 26.66,55.4 R20.1
N$31
  Top 0.61: R10.2 R11.1
  Bottom 0.61: C9.2 R10.2
N$32  (via drill 0.9 pad 1.68)
  Bottom 0.61: R12.2 10.79,52.23 19.04,52.23 | IC4.5 19.04,52.23 | 19.04,52.23 20.31,50.95 v21.58,50.95 C11.+
N$33
  Bottom 0.61: RV2.1S 7.61,59.21 10.15,56.67 IC4.3
N$34
  Top 0.61: RV1.1S 8.25,89.69 9.52,88.42 17.77,88.42 IC3.5
N$35
  Bottom 0.61: R22.1 R21.1 53.83,86.51 IC5.3
N$36
  Bottom 0.61: IC5.1 56.37,94.76 R21.2 44.94,83.33 43.03,83.33 RV3.1E
N$37
  Top 0.61: R23.2 52.56,88.41 RV3.1S
N$38
  Top 0.61: C13.1 56.37,97.94 IC5.6
  Bottom 0.61: IC5.6 62.72,87.78 62.72,85.87 R23.1
N$39
  Bottom 0.61: RV3.1A 44.38,92.14 R24.1
N$40
  Top 0.61: R22.2 62.09,81.43 59.55,78.89 59.55,75.71 IC6.3 | C13.2 62.72,94.13 IC5.7
  Bottom 0.61: IC5.7 66.53,90.32 66.53,83.33 R22.2
N$41
  Top 0.61: IC6.2 54.47,73.17 54.47,67.46 50.66,63.65 48.75,63.65 RV6.1S
N$42
  Bottom 0.61: PR5.A 54.47,40.15 R25.2
N$43
  Top 0.61: PR5.E 46.21,45.23 43.67,42.69 PR5.S 40.49,43.33 40.49,61.11 42.32,62.93 RV6.1A
N$44
  Top 0.61: IC6.6 62.09,73.17 60.81,71.9 60.81,68.09 58.91,66.19 55.73,66.19 51.92,62.38 51.92,52.22 R26.2
N$45
  Top 0.61: R26.1 55.73,42.06 57.01,40.79 57.01,38.25 C14.2
N$46
  Top 0.61: RV4.1E 43.12,22.45 45.58,24.91 45.58,31.26 47.48,33.17 C14.1
N$47
  Bottom 0.61: RV4.1S 43.67,27.45 45.58,25.55 45.58,23.01 47.48,21.1 52.56,21.1 54.47,19.2 54.47,14.44 55.73,13.16 58.27,13.16 59.86,11.58 59.86,9.67 58.59,8.4 R27.2
N$48
  Top 0.61: IC10.1 70.97,96.03 68.44,93.49 C15.2
  Bottom 0.61: R39.2 68.44,75.08 69.7,76.35 71.61,76.35 IC11.2 71.61,80.16 71.61,87.78 C15.2
N$49
  Top 0.61: IC10.7 78.59,90.95 78.59,87.78 R41.1
  Bottom 0.61: R41.1 R40.2 85.58,82.7 C16.2
N$50
  Top 0.61: R41.2 76.06,82.7 76.06,78.25 IC11.3 70.97,73.17 R42.1
N$51
  Top 0.61: IC11.1 R42.2 69.7,76.98 69.7,68.73 72.25,68.73 R43.1
N$52
  Bottom 0.61: Q3.C 77.33,48.41 74.78,45.87 R44.1 R45.2 72.88,42.06 72.88,37.61 76.06,34.44 76.06,19.2 74.15,17.29 IC12.5
N$53
  Bottom 0.61: R45.1 80.5,42.69 77.33,39.52 Q4.B
N$54
  Top 0.61: 82.41,68.09 82.41,56.03 D6.C Q3.B | 82.41,68.09 82.41,68.73 R43.2 | R50.2 82.41,68.09
N$55
  Bottom 0.61: Q4.C 81.14,37.61 R46.1 83.67,31.9 83.67,26.18 82.41,24.91 IC12.13
N$56
  Bottom 0.61: R46.2 73.52,31.9 LED11.A
N$57
  Top 0.61: R36.1 50.02,21.1 52.56,21.1 56.37,17.29 IC9.3 59.55,17.29 59.55,14.12 R35.1
N$58
  Bottom 0.61: R37.1 R38.1 53.83,22.37 56.37,19.83 IC9.2
N$59
  Top 0.61: R38.2 59.55,25.55 PR2.S
N$60
  Bottom 0.61: IC9.5 65.26,14.75 R34.2
N$61
  Bottom 0.61: R32.1 69.7,45.23 67.17,42.69 R33.2 68.44,37.61 Q2.E
N$62
  Top 0.61: PR1.S 62.72,42.06 R33.1
N$63
  Top 0.61: PR3.S 77.33,69.36 IC11.5
N$64
  Top 0.61: IC11.6 85.58,71.27 85.58,66.82 84.31,65.55 84.31,55.39 81.77,52.85 81.77,47.77 83.04,46.5 83.04,33.8 80.5,31.26 79.23,31.26 75.42,27.45 IC12.1
  Bottom 0.61: IC11.7 IC11.6
N$65
  Bottom 0.61: 67.17,61.74 IC8.7 | D5.A 67.17,61.74 | 67.17,61.74 69.7,59.2 R32.2
N$66
  Top 0.61: IC8.1 IC8.2 58.27,61.74 63.35,56.66 IC8.5
N$67
  Bottom 0.61: IC8.6 D5.C R31.1
N$68
  Bottom 0.61: IC8.3 53.83,59.2 | R30.1 53.83,57.93 53.83,59.2 | 53.83,59.2 C17.2 53.83,64.28 R29.2
N$69
  Top 0.61: PR3.A 71.61,54.12 71.61,47.14 65.26,40.79 65.26,32.53 63.99,31.26 63.99,24.91 62.09,23.01 62.09,17.29 IC9.6
N$70
  Top 0.61: Q2.C 67.8,31.9 65.26,29.36 65.26,25.55 67.8,23.01 R34.1
OUT
  Bottom 0.61: IC4.6 IC4.7 19.68,59.84 31.74,59.84 OUT.1 OUT.2
OUT1
  Top 0.61: IO.6 IO.7 87.48,63.01 86.22,61.74 86.22,54.76 83.67,52.22 83.67,47.77 84.94,46.5 84.94,33.17 81.14,29.36 79.86,29.36 75.42,24.91 IC12.2 IC12.3
SWITCHED_GND
  Bottom 0.61: R15.1 31.74,91.59 LINE.1
TONE_IN
  Top 0.61: LIM1.2 31.74,78.89 29.84,76.99 20.95,76.99 19.68,75.72 R18.1
  Bottom 0.61: R17.1 18.41,77.62 R18.1
TONE_OUT
  Top 0.61: IC4.1 13.33,61.75 15.23,59.84 15.23,53.49 16.5,52.23 20.31,52.23 21.58,53.49 R20.2 | R20.2 R11.2 | LIM2.1 26.66,52.86 24.12,55.4 R20.2
V_UV_ON_OFF
  Top 0.61: R50.1 86.22,73.17 IO.3 IO.4
VCA_CTRL
  Bottom 0.61: R29.1 72.25,67.46 74.78,64.92 80.5,64.92 91.93,53.49 91.93,19.2 90.66,17.93 BOARD2.2
VCA_SIGNAL
  Bottom 0.61: R35.2 65.26,11.58 67.17,9.67 81.77,9.67 87.48,15.39 BOARD2.3
VDD
  Bottom 0.61: IC12.14 81.14,31.9 74.78,38.25 Q4.E 74.78,39.52 R44.2 83.67,48.41 BOARD2-PWR.2
VSS
  Top 0.61: LED11.K 71.61,24.28 70.34,23.01 70.34,13.48 71.61,12.21 IC12.7
  Bottom 0.61: D6.A 74.78,52.22 | LED11.K 71.61,48.41 72.88,49.68 Q3.E 74.78,52.22 | 74.78,52.22 82.41,52.22 83.67,50.95 BOARD2-PWR.1
X
  Top 0.61: IC12.4 78.59,19.83 79.86,18.56 85.58,18.56 87.48,20.47 BOARD2.1

## Text on the board
bPlace: 4V&B
tNames: 4V&B | ETI Vocoder | Input amp | v1.0 2.1.17 | Input | ETI Vocoder | Internal Excitation | Lower board v1.0 | +5V | -12V | GND | +12V | 4V&B
bNames: +12V | In | gnd | Mic | GND | sw gnd | -12V | From mic | Line | In | GND | Amp out | <2kHz | Lim ret | Lim 1 | +12V | V/UV | GND | V/UV | 12V | -12V | Output | Output | Ext exc | Out | Tone out | Lim | Lim 2 | -7V | ret | +7V | X | VCA ctrl | VCA sig | MIX | ETI Vocoder | LED PPM v1.0 | v1.0 - 01.02.17 | Red | +
tValues: 02.01.17